# Altium PCB MB1199.PcbDoc
Units mil, origin at the board's own origin, x right, y up, seen from the top; angles counter-clockwise.
Board outline 3149.61 x 472.44 mil, 2 copper layers (Top Layer, Bottom Layer); 1 components, 0 nets, 1 pads, 0 vias.
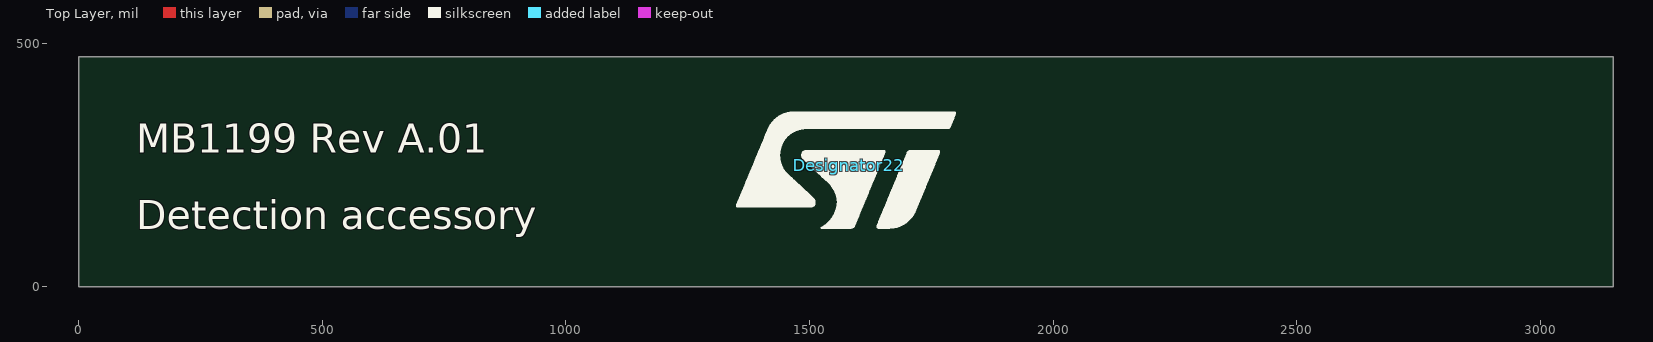
[diagram p0: Top Layer view]
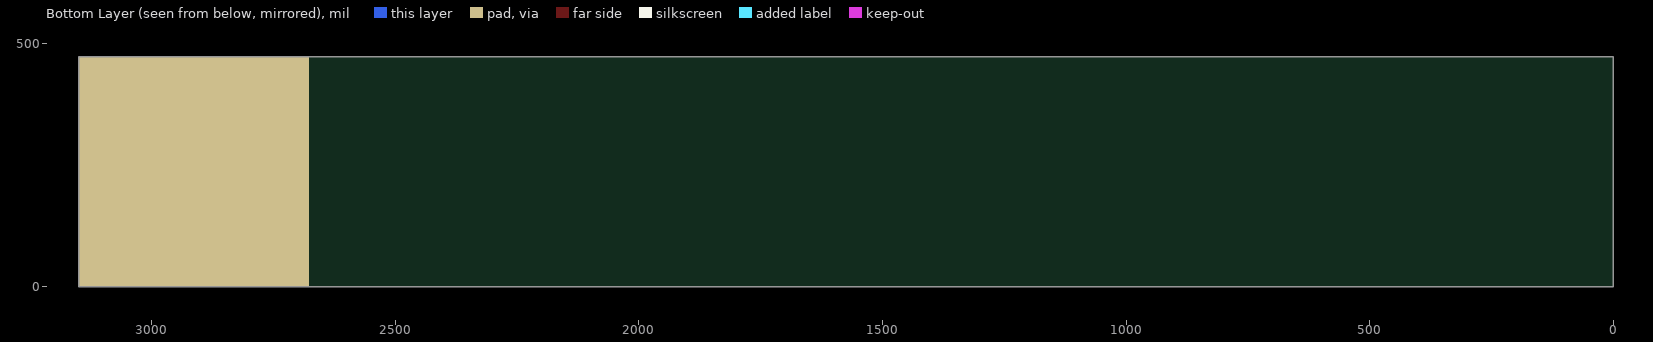
[diagram p1: Bottom Layer view, seen from below]

## Layer stack, top to bottom
Top Layer: signal copper 1.4
Dielectric: dielectric 12.6, FR-4, Dk 4.8
Bottom Layer: signal copper 1.4

## Board outline
0,0 0,472.44 3149.61,472.44 3149.61,0 0,0

## Design rules (kind name [scope] priority, off if disabled: settings)
Clearance [All] p1: gap=10
ComponentClearance [All] p1: gap=10 collisioncheckmode=3 verticalgap=10
PolygonConnect [All] p1: connectstyle=Relief reliefconductorwidth=10 reliefentries=4 polygonreliefangle="90 Angle"
RoutingVias [All] p1: holewidth=28 width=50 viastyle="Through Hole" minholewidth=28 minwidth=50 maxholewidth=28 maxwidth=50
SolderMaskExpansion [All] p1: expansion=4
TestPointUsage [All] p1: valid=0 allowmultiple=FALSE
Testpoint [All] p1: side=15 testpointundercomponent=TRUE minsize=40 maxsize=100 preferedsize=60 minholesize=0 maxholesize=40 preferedholesize=32 testpointgrid=1 style=1023 order=0123456789
Width [All] p1: maxlimit=10 minlimit=10 preferedwidth=10
18 further rules are at their usual default settings.

## Components (designator, comment, footprint, x,y, rotation, side; value= is the part's Value field where it differs from the comment)
Designator22 "Comment" ST_LOGO_10mm 1580,250 r0 top

## Footprints (in the part's own frame and the unit in brackets; to place one, negate y for a bottom-side part, rotate by r counter-clockwise, add the part's x,y. Pads: shape width x height; smd on the part's side, far side on the other; paste and mask are expansions set on the pad)
ST_LOGO_10mm [mil]
  silkscreen extent -230,-130 220,110

## Free pads (board coordinates)
  rect 472.44x472.44 smd far side: 0(2913.39,236.22)

## Nets (pads, with @x,y where several pads share a name; then routed paths per layer and width w, separated by ;. In a path a pad name is that pad's centre, name@x,y a point inside that pad or via, vN(x,y) a via of type N, cw(c..) or ccw(c..) an arc to the next point about the centre after c; other vN are vias at no path point)

## Other copper
Top Layer:
  text ".Legend" at 1574.8,-236.22 h30

## Silkscreen, mask and mechanical layers (free items; w line width, h text height)
Top Overlay:
  text "MB1199 Rev A.01" at 118.11,275.59 h59.06
  text "Detection accessory" at 118.11,118.11 h59.06
Mechanical 1:
  the board outline again, w5
  text "MB1199" at 118.11,629.92 h60
Drill Drawing:
  lines w1.97: 886.77,-287.73 1357.32,-287.73 ; 886.77,-269.62 1357.32,-269.62 ; 826.77,-387.8 ccw(c832.68,-387.8) 832.68,-393.7 1417.32,-393.7 1417.32,-242.13 ccw(c1411.42,-242.13) 1411.42,-236.22 832.68,-236.22 ccw(c832.68,-242.13) 826.77,-242.13 826.77,-387.8
  text "Notes:" at 7.8,-213.07 h40
  text "Layer Stack Up Detail for: MB1199.PcbDoc" at 886.77,-261.38 h11.81
  text "Layer" at 886.77,-276.51 h3.94
  text "Gerber" at 992.72,-276.51 h3.94
  text "Copper" at 1037.58,-276.51 h3.94
  text "Dielectric" at 1088.87,-276.51 h3.94
  text "Dielectric" at 1142.92,-276.51 h3.94
  text "Dielectric" at 1219.35,-276.51 h3.94
  text "Dielectric" at 1273.39,-276.51 h3.94
  text "Silkscreen color : White" at 67.8,-283.07 h35
  text "Name" at 886.77,-284.38 h3.94
  text "Document" at 992.72,-284.38 h3.94
  text "Thickness" at 1037.58,-284.38 h3.94
  text "Height" at 1088.87,-284.38 h3.94
  text "Material" at 1142.92,-284.38 h3.94
  text "Constant" at 1219.35,-284.38 h3.94
  text "Type" at 1273.39,-284.38 h3.94
  text "Top Solder Mask" at 886.77,-298.56 h5.91
  text "(.GTS)" at 992.72,-298.56 h5.91
  text "0.0102mm" at 1088.87,-298.56 h5.91
  text "Solder Resist" at 1142.92,-298.56 h5.91
  text "3.50" at 1219.35,-298.56 h5.91
  text "Top Layer" at 886.77,-318.24 h5.91
  text "(.GTL)" at 992.72,-318.24 h5.91
  text "0.0356mm" at 1037.58,-318.24 h5.91
  text "0.7mm" at 1088.87,-328.08 h5.91
  text "FR-4" at 1142.92,-328.08 h5.91
  text "4.80" at 1219.35,-328.08 h5.91
  text "Core" at 1273.39,-328.08 h5.91
  text "Bottom Layer" at 886.77,-337.93 h5.91
  text "(.GBL)" at 992.72,-337.93 h5.91
  text "0.0356mm" at 1037.58,-337.93 h5.91
  text "Solder resist color : Blue" at 67.8,-343.07 h35
  text "Bottom Solder Mask" at 886.77,-357.61 h5.91
  text "(.GBS)" at 992.72,-357.61 h5.91
  text "0.0102mm" at 1088.87,-357.61 h5.91
  text "Solder Resist" at 1142.92,-357.61 h5.91
  text "3.50" at 1219.35,-357.61 h5.91
  text "Plating type : lead Gold" at 67.8,-403.07 h35

## Dimensions
0,0 to 0,472.44 on Drill Drawing
0,472.44 to 3149.61,472.44 on Drill Drawing